# Altium PCB PCB1_Young.PcbDoc
Units mil, origin at the board's own origin, x right, y up, seen from the top; angles counter-clockwise.
Board outline 3428.5 x 1850 mil, 2 copper layers (Top Layer, Bottom Layer); 29 components, 26 nets, 126 pads, 0 vias.
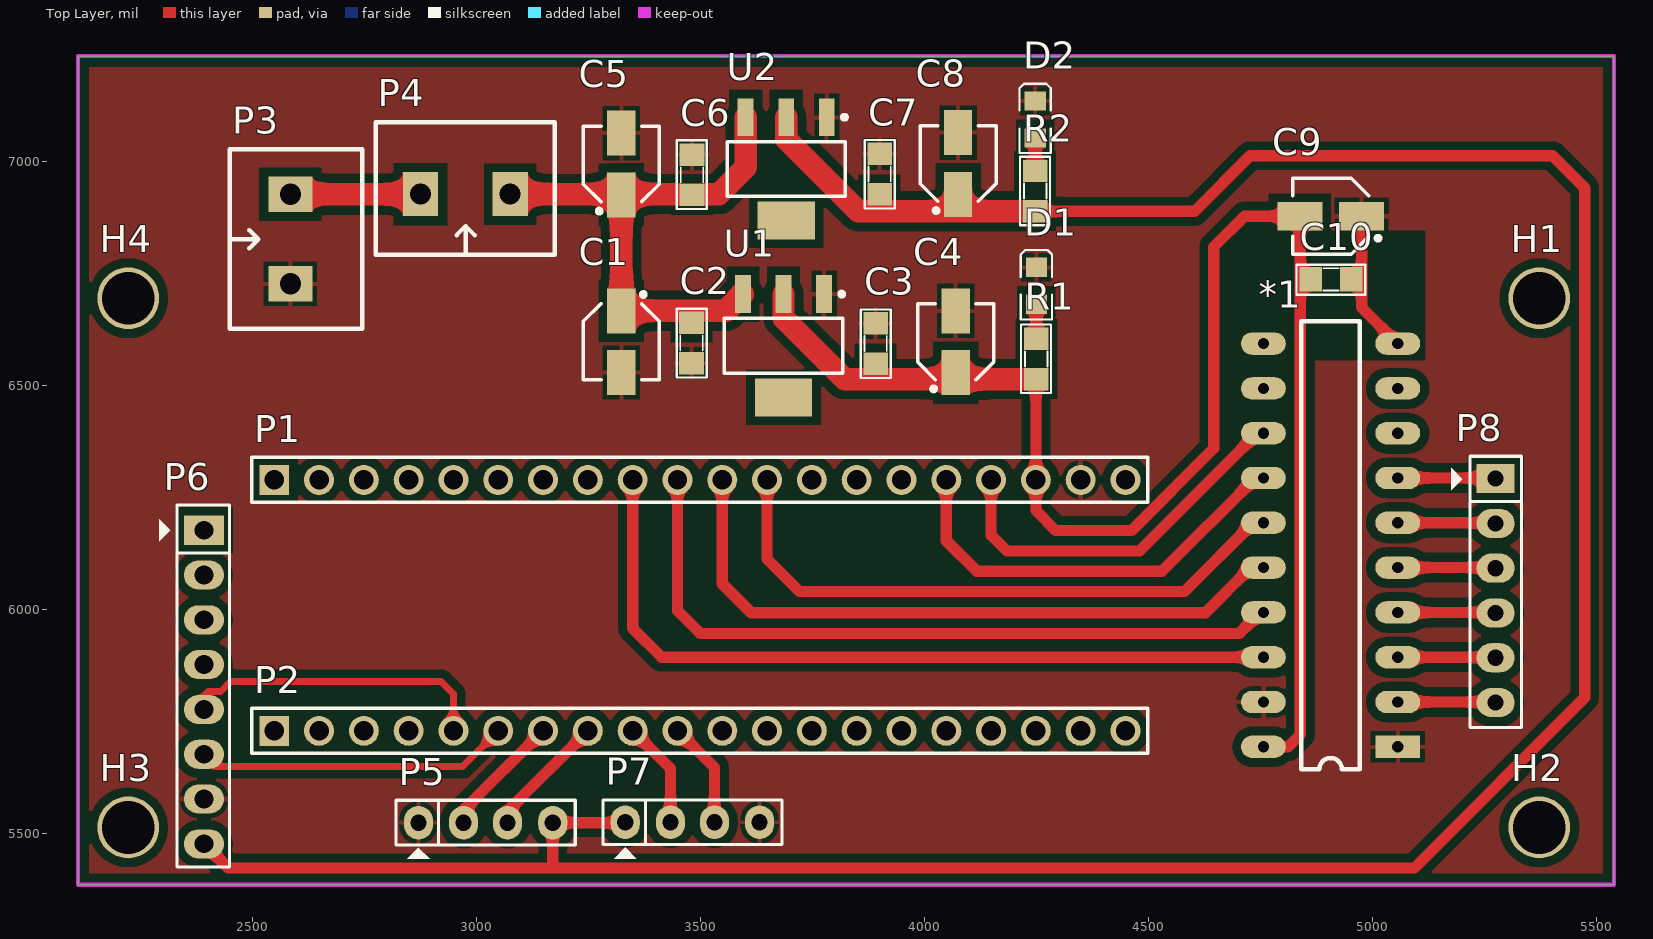
[diagram p0: Top Layer view]
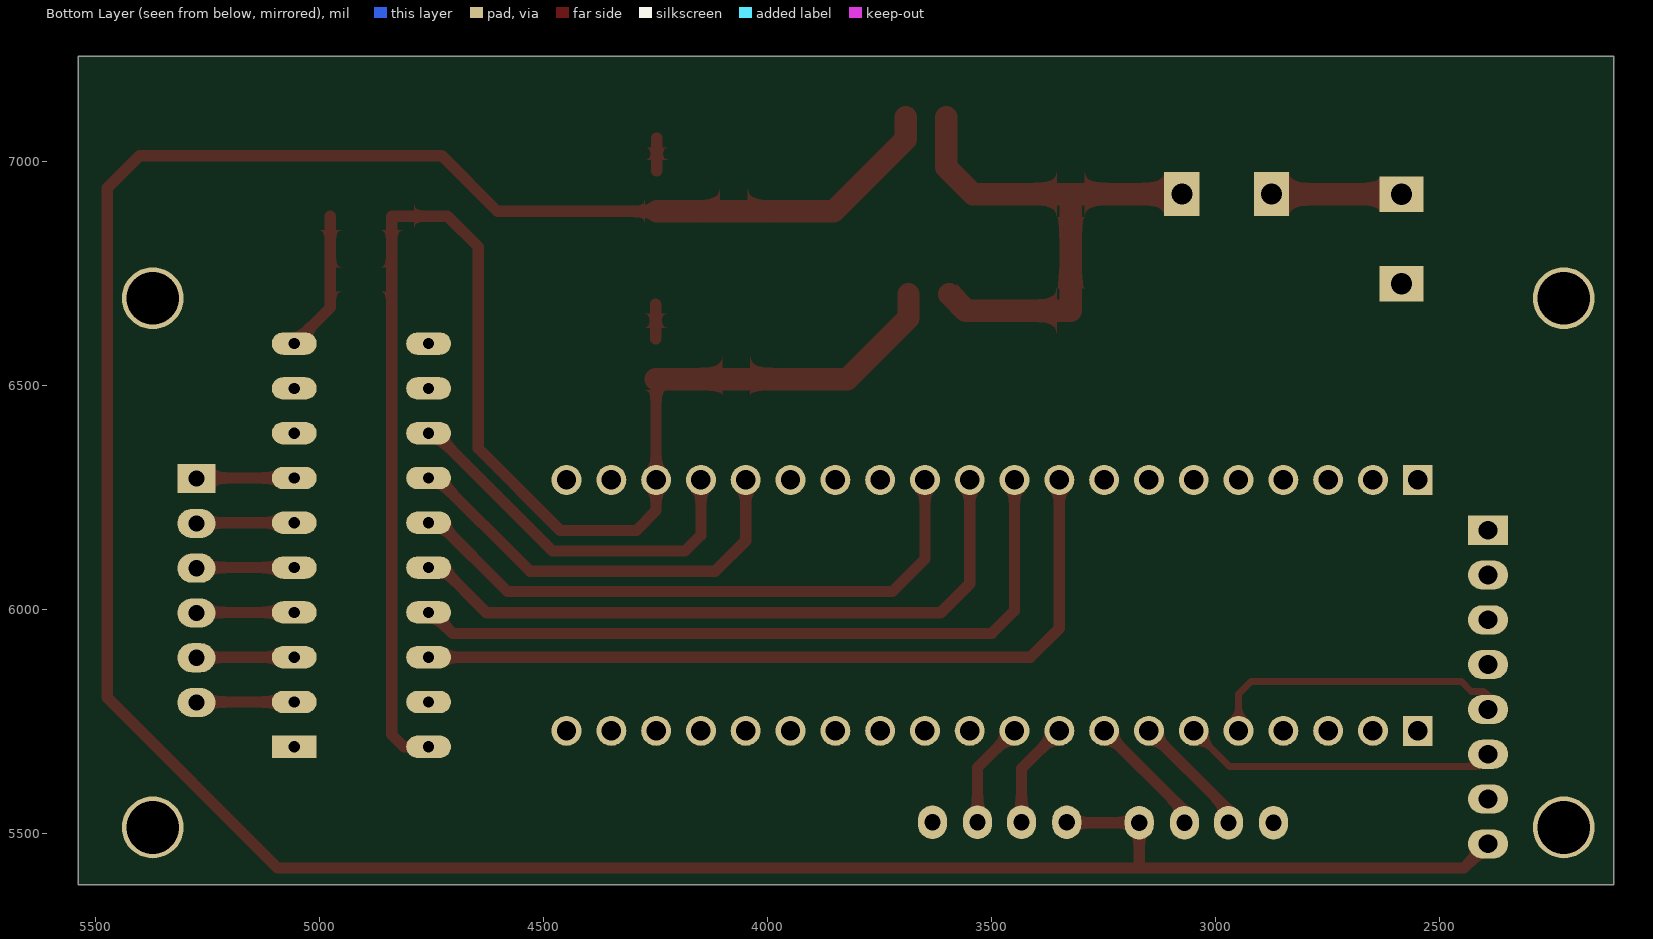
[diagram p1: Bottom Layer view, seen from below]
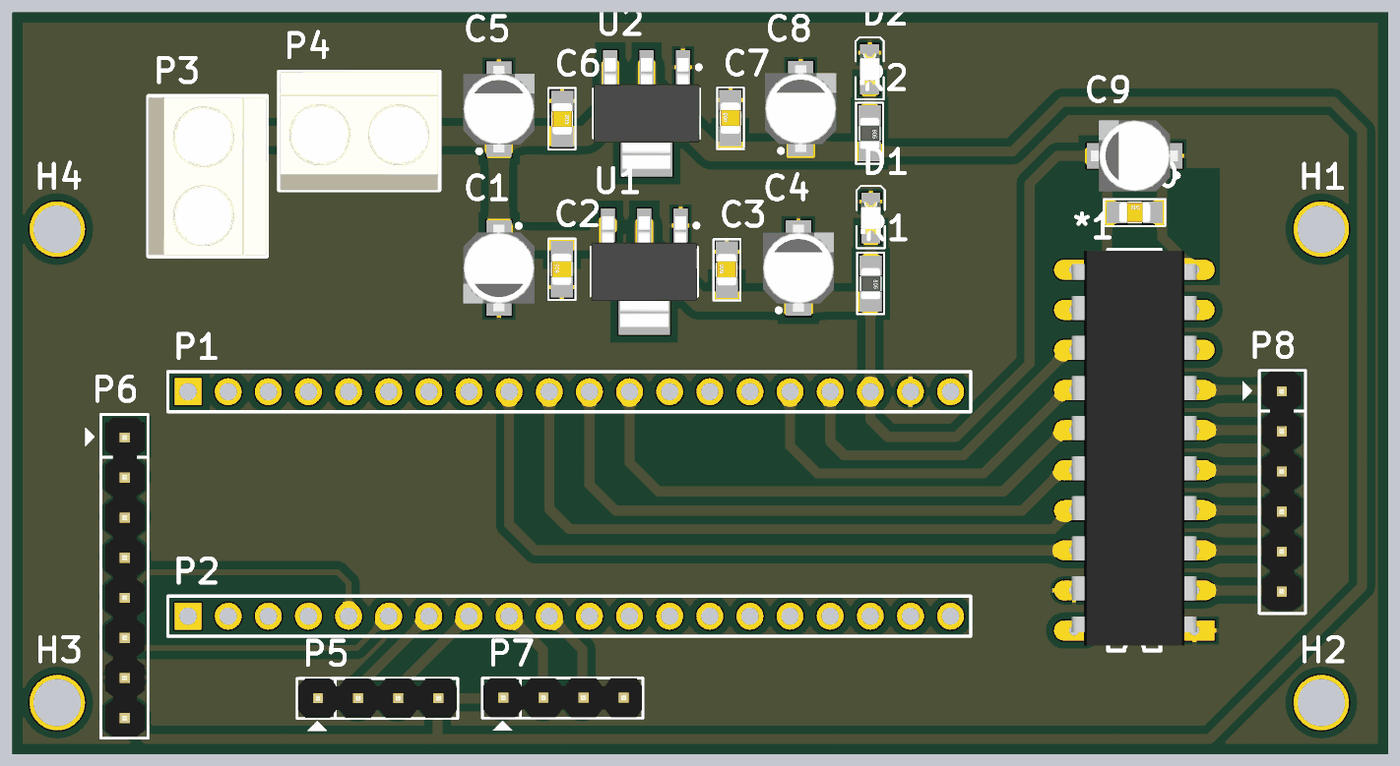
[diagram p2: 3D render of the assembled board from above, using the file's embedded part models]

## Layer stack, top to bottom
Top Solder: solder mask 0.4, Solder Resist, Dk 3.5
Top Layer: signal copper 1.4
Dielectric 1: dielectric 12.6, FR-4, Dk 4.8
Bottom Layer: signal copper 1.4
Bottom Solder: solder mask 0.4, Solder Resist, Dk 3.5

## Board outline
2110,5385 2110,7235 5538.5,7235 5538.5,5385

## Design rules (kind name [scope] priority, off if disabled: settings)
Clearance [All] p1: gap=20
DiffPairsRouting [All] p1: maxlimit=10 minlimit=10 mostfreqgap=10 toplayer_minwidth=15 toplayer_maxwidth=15 toplayer_prefwidth=15 bottomlayer_minwidth=15 bottomlayer_maxwidth=15 bottomlayer_prefwidth=15 maxuncoupledlength=500
MinimumSolderMaskSliver [All] p1: minsoldermaskwidth=0
PolygonConnect [All] p1: connectstyle=Relief reliefconductorwidth=10 reliefentries=4 polygonreliefangle="90 Angle" airgapwidth=10
RoutingVias [All] p1: holewidth=19.68 width=39.37 viastyle="Through Hole" minholewidth=19.68 minwidth=39.37 maxholewidth=39.37 maxwidth=78.74
SilkToSilkClearance [All] p1: silktosilkclearance=0
SilkToSolderMaskClearance [IsPad] p1: minsilkscreentomaskgap=0 clearancetoexposedcopper=TRUE
SolderMaskExpansion [All] p1: expansion=4
Width [All] p1: maxlimit=50 minlimit=10 preferedwidth=25
26 further rules are at their usual default settings.

## Classes and differential pairs
differential pair S: +S_P -S_N

## Components (designator, comment, footprint, x,y, rotation, side; value= is the part's Value field where it differs from the comment)
*1 "74HC245" DIP20-3D 5055.85,5693.1 r180 top
C1 "Cap Pol SMD" "CAP ALU SIZE B" 3322.65,6597.4 r270 top
C2 "Cap Non-Pol SMD" CAP-SM-0805 3479.4,6549.6 r90 top
C3 "Cap Non-Pol SMD" CAP-SM-0805 3890.35,6548.4 r90 top
C4 "Cap Pol SMD" "CAP ALU SIZE B" 4069.05,6597.3 r90 top
C5 "Cap Pol SMD" "CAP ALU SIZE B" 3322.65,6994.05 r90 top
C6 "Cap Non-Pol SMD" CAP-SM-0805 3480.4,7014.7 r270 top
C7 "Cap Non-Pol SMD" CAP-SM-0805 3899.2,6926.45 r90 top
C8 "Cap Pol SMD" "CAP ALU SIZE B" 4074.55,6995.15 r90 top
C9 "Cap Pol SMD" "CAP ALU SIZE B" 4906.35,6877.5 r180 top
C10 "Cap Non-Pol SMD" CAP-SM-0805 4862,6736.3 r0 top
D1 "LED SMD" LED_0805_Blue 4249.25,6722.1 r90 top
D2 "LED SMD" LED_0805_Blue 4246.5,7093.3 r90 top
H1 "Hole" "LO KHOAN 3MM" 5371.71,6694.36 r0 top
H2 "Hole" "LO KHOAN 3MM" 5371.71,5513.26 r0 top
H3 "Hole" "LO KHOAN 3MM" 2222.1,5513.26 r0 top
H4 "Hole" "LO KHOAN 3MM" 2222.1,6694.36 r0 top
P1 "Header 21-40" HDR1X20 2548.05,6288.85 r0 top
P2 "Header 1-20" HDR1X20 2548.05,5728.85 r0 top
P3 "Domino 2" "DOMINO 2- 5mm" 2584.1,6826.5 r90 top
P4 "Domino 2" "DOMINO 2- 5mm" 2974.55,6926.85 r180 top
P5 "Header 4" JP4 2969.8,5523.65 r0 top
P6 "Header 8" JP8 2391.2,6176.5 r270 top
P7 "Header 4" JP4 3431.45,5524.65 r0 top
P8 "Header 6" JP6 5274.3,6291.75 r270 top
R1 "RESISTOR SMD" RES-SM-0805 4249,6603.7 r270 top
R2 "RESISTOR SMD" RES-SM-0805 4246.5,6978.3 r270 top
U1 "AMS1117-5" SOT230P700X180-4N 3684.8,6588.35 r270 top
U2 "AMS1117-3.3" SOT230P700X180-4N 3690.75,6983.1 r270 top

## Footprints (in the part's own frame and the unit in brackets; to place one, negate y for a bottom-side part, rotate by r counter-clockwise, add the part's x,y. Pads: shape width x height; smd on the part's side, far side on the other; paste and mask are expansions set on the pad)
"CAP ALU SIZE B" [mm] "Capacitor, Aluminium Electrolytric, 4.3mm L X 4.3mm W X 5.4mm H, IPC Medium Density"
  rect 2.55x1.6 smd: 1(-1.75,0) 2(1.75,0)
  silkscreen extent -2.8,-2.15 2.15,2.15, body extent -2.75,-2.25 2.75,2.25, height 5.7
CAP-SM-0805 [mil]
  rect 50x55 smd: 1(0,0) 2(90,0)
  silkscreen extent -32,-34 121,33, body extent 6,-25 84,25, height 31
DIP20-3D [mil]
  rect 100x50 hole 25: 1(0,0)
  oval 100x50 hole 25: 2(0,-100) 3(0,-200) 4(0,-300) 5(0,-400) 6(0,-500) 7(0,-600) 8(0,-700) 9(0,-800) 10(0,-900) 11(300,-900) 12(300,-800) 13(300,-700) 14(300,-600) 15(300,-500) 16(300,-400) 17(300,-300) 18(300,-200) 19(300,-100) 20(300,0)
  silkscreen extent 85,-950 215,50, body extent -6,-948 306,38, height 179
"DOMINO 2- 5mm" [mm]
  rect 2x2.5 hole 1.2: 1(-2.54,0) 2(2.54,0)
  silkscreen extent -5.08,-4.08 5.08,3.43, body extent -5,-4.07 5,3.43, height 10
HDR1X20 [mm] "Connector; Header; 20 Position"
  rect 1.7x1.7 hole 1.1: 1(0,0)
  round 1.7 hole 1.1: 2(2.54,0) 3(5.08,0) 4(7.62,0) 5(10.16,0) 6(12.7,0) 7(15.24,0) 8(17.78,0) 9(20.32,0) 10(22.86,0) 11(25.4,0) 12(27.94,0) 13(30.48,0) 14(33.02,0) 15(35.56,0) 16(38.1,0) 17(40.64,0) 18(43.18,0) 19(45.72,0) 20(48.26,0)
  silkscreen extent -1.27,-1.27 49.53,1.27
JP4 [mil] "Jumper 4"
  oval 65x75 hole 36: 1(-100,0) 2(1,0) 3(99,0) 4(200,0)
  silkscreen extent -150,-81 250,50, body extent -148,-48 248,50, height 323
JP6 [mil] "JP6"
  rect 65x85 hole 36: 1(0,0)
  oval 65x85 hole 36: 2(100,0) 3(200,0) 4(300,0) 5(400,0) 6(500,0)
  silkscreen extent -50,-99 556,58, body extent -48,-50 548,48, height 323
JP8 [mil] "JP8"
  rect 65x90 hole 42: 1(0,0)
  oval 65x90 hole 42: 2(100,0) 3(200,0) 4(300,0) 5(400,0) 6(500,0) 7(600,0) 8(700,0)
  silkscreen extent -56,-100 752,57, body extent -48,-50 748,48, height 323
LED_0805_Blue [mm] "Chip LED, 2-Leads, Body 2.0x1.3mm, IPC Medium Density"
  rect 1.1x1.2 smd: 1(-1.05,0) 2(1.05,0)
  silkscreen extent -1.91,-0.89 2.03,0.89, body extent -1,-0.63 1,0.62, height 0.68
"LO KHOAN 3MM" [mil]
  round 138 hole 118.1: 1(0,0)
RES-SM-0805 [mil]
  rect 50x55 smd: 1(0,0) 2(90,0)
  silkscreen extent -32,-34 121,33, body extent 6,-25 84,25, height 31
SOT230P700X180-4N [mm] "SOT223, 4-Leads, Body 6.50x7.00mm (avg), Pitch 2.30mm, IPC Medium Density"
  rect 2.15x0.9 smd: 1(-2.925,2.3) 2(-2.925,0) 3(-2.925,-2.3)
  rect 2.15x3.25 smd: 4(2.925,0)
  silkscreen extent -3.05,-3.35 1.55,3.43, body extent -3.5,-3.35 3.5,3.35, height 1.8

## Part data
C1 C4 C5 C8 C9: "Polarized Capacitor (Radial)"
C2 C3 C6 C7 C10: "Capacitor"
D1 D2: "LED"
H1 H2 H3 H4: "Hole 3mm"
P1 P2: library part "Header 20", "Header, 20-Pin"
P3 P4: "Domino, 2-Pin"
P5 P7: "Header, 4-Pin"
P6: "Header, 8-Pin"
P8: "Header, 6-Pin"
R1 R2: "Resistor"
U1: library part AMS1117-3.3

## Nets (pads, with @x,y where several pads share a name; then routed paths per layer and width w, separated by ;. In a path a pad name is that pad's centre, name@x,y a point inside that pad or via, vN(x,y) a via of type N, cw(c..) or ccw(c..) an arc to the next point about the centre after c; other vN are vias at no path point)
1_IN1: *1.18 P1.9 | length 1765.7
  Top Layer w25: P1.9 3348.05,5957.7 3412.65,5893.1 *1.18
1_IN2: *1.17 P1.10 | length 1640.4
  Top Layer w25: P1.10 3448.05,5996.95 3499.05,5945.95 4702.38,5945.95 4749.53,5993.1 *1.17
1_IN3: *1.16 P1.11 | length 1508.2
  Top Layer w25: P1.11 3548.05,6057 3612.7,5992.35 4626.5,5992.35 4727.25,6093.1 *1.16
1_IN4: *1.15 P1.12 | length 1377.8
  Top Layer w25: P1.12 3648.05,6112.1 3720.15,6040 4580.1,6040 4733.2,6193.1 *1.15
3.3: C7.1 C8.1 P5.4 P6.8 P7.1 R2.2 U2.2 | length 6640.3
  Top Layer w25: P6.8 2445.2,5422.5 5092.8,5422.5 5473.21,5802.91 5473.21,6940.14 5401,7012.35 4726.4,7012.35 4602.35,6888.3 R2.2 ; 3169.8,5423.85 P5.4 3330.45,5523.65 P7.1
  Top Layer w50: U2.2 3690.75,7049.55 3852,6888.3 R2.2
5V: *1.20 C3.1 C4.1 C9.2 C10.1 P1.18 R1.2 U1.2 | length 3379.3
  Top Layer w25: R1.2@4248.05,6512.75 P1.18 4248.05,6220.2 4292.1,6176.15 4462.06,6176.15 4645,6359.09 4645,6808.2 4714.3,6877.5 C9.2 4838.35,6876.6 4838.35,5720.3 4811.15,5693.1 *1.20
  Top Layer w50: U1.2 3684.8,6650.05 3821.15,6513.7 R1.2
CA1: P2.7 P5.2 | length 278.6
  Top Layer w25: P5.2 2970.8,5551.6 P2.7
CA2: P2.9 P7.2 | length 239.2
  Top Layer w25: P2.9 3432.45,5644.45 P7.2
CB1: P2.8 P5.3 | length 279.4
  Top Layer w25: P5.3 3068.8,5549.6 P2.8
CB2: P2.10 P7.3 | length 238.3
  Top Layer w25: P2.10 3530.45,5646.45 P7.3
GND: *1.1 *1.10 *1.19 C1.2 C2.1 C3.2 C4.2 C5.2 C6.1 C7.2 C8.2 C9.1 C10.2 D1.2 D2.2 P1.19 P3.1 P5.1 P6.7 P7.4 U1.1 U2.1 | length 317.8
  Top Layer w25: C9.1 4975.25,6673.7 *1.10
Net*1_2: *1.2 P8.6 | length 219
  Top Layer w25: *1.2 5272.95,5793.1 P8.6
Net*1_3: *1.3 P8.5 | length 219
  Top Layer w25: *1.3 5272.95,5893.1 P8.5
Net*1_4: *1.4 P8.4 | length 219
  Top Layer w25: *1.4 5272.95,5993.1 P8.4
Net*1_5: *1.5 P8.3 | length 219
  Top Layer w25: *1.5 5272.95,6093.1 P8.3
Net*1_6: *1.6 P8.2 | length 219
  Top Layer w25: *1.6 5272.95,6193.1 P8.2
Net*1_7: *1.7 P8.1 | length 219
  Top Layer w25: *1.7 5272.95,6293.1 P8.1
NetC1_1: C1.1 C2.2 C5.1 C6.2 P4.1 U1.3 U2.3 | length 1208.1
  Top Layer w50: P4.1 3540.7,6926.85 3600.2,6986.35 U2.3 ; C5.1 C1.1 3557.04,6666.3 U1.3
NetD1_1: D1.1 R1.1 | length 77.2
  Top Layer w25: R1.1 4249,6680.51 D1.1
NetD2_1: D2.1 R2.1 | length 73.7
  Top Layer w25: R2.1 D2.1
NetP3_2: P3.2 P4.2 | length 290.6
  Top Layer w50: P3.2 2874.2,6926.5 P4.2
PWM1: *1.14 P1.16 | length 958
  Top Layer w25: P1.16 4048.05,6153.05 4116.1,6085 4529.8,6085 4737.9,6293.1 *1.14
PWM2: *1.13 P1.17 | length 854.9
  Top Layer w25: P1.17 4148.05,6165.4 4183.45,6130 4479.55,6130 4742.65,6393.1 *1.13
S_N: P2.5 P6.5 | length 693.9
  Top Layer w15: P6.5 2391.2,5806.5 2401.2,5816.5 2428.55,5816.5 2450.8,5838.75 2920.45,5838.75 2948.05,5811.15 P2.5
S_P: P2.6 P6.6 | length 701.3
  Top Layer w15: P6.6 2418.65,5649.05 2968.25,5649.05 P2.6
VB: P2.20
pads on no net: *1.8 *1.9 *1.11 *1.12 H1.1 H2.1 H3.1 H4.1 P1.1 P1.2 P1.3 P1.4 P1.5 P1.6 P1.7 P1.8 P1.13 P1.14 P1.15 P1.20 P2.1 P2.2 P2.3 P2.4 P2.11 P2.12 P2.13 P2.14 P2.15 P2.16 P2.17 P2.18 P2.19 P6.1 P6.2 P6.3 P6.4 U1.4 U2.4

## Polygon pours and split planes (outlines as drawn)
GND on Top Layer "GND_L01_P010" (solid, remove dead copper, pour order 10): 2110,5385 2110,7235 5538.5,7235 5538.5,5385

## Keep-outs
Top Layer:
  the board outline again, w10

## Other copper
Top Layer:
  pour cut-out: 4862,6846.12 4862,6555.25 5118.3,6555.25 5118.3,6846.12 4988.05,6846.12